# EAGLE board 3K_valdiklis_v1.2.job (EAGLE 6.4)
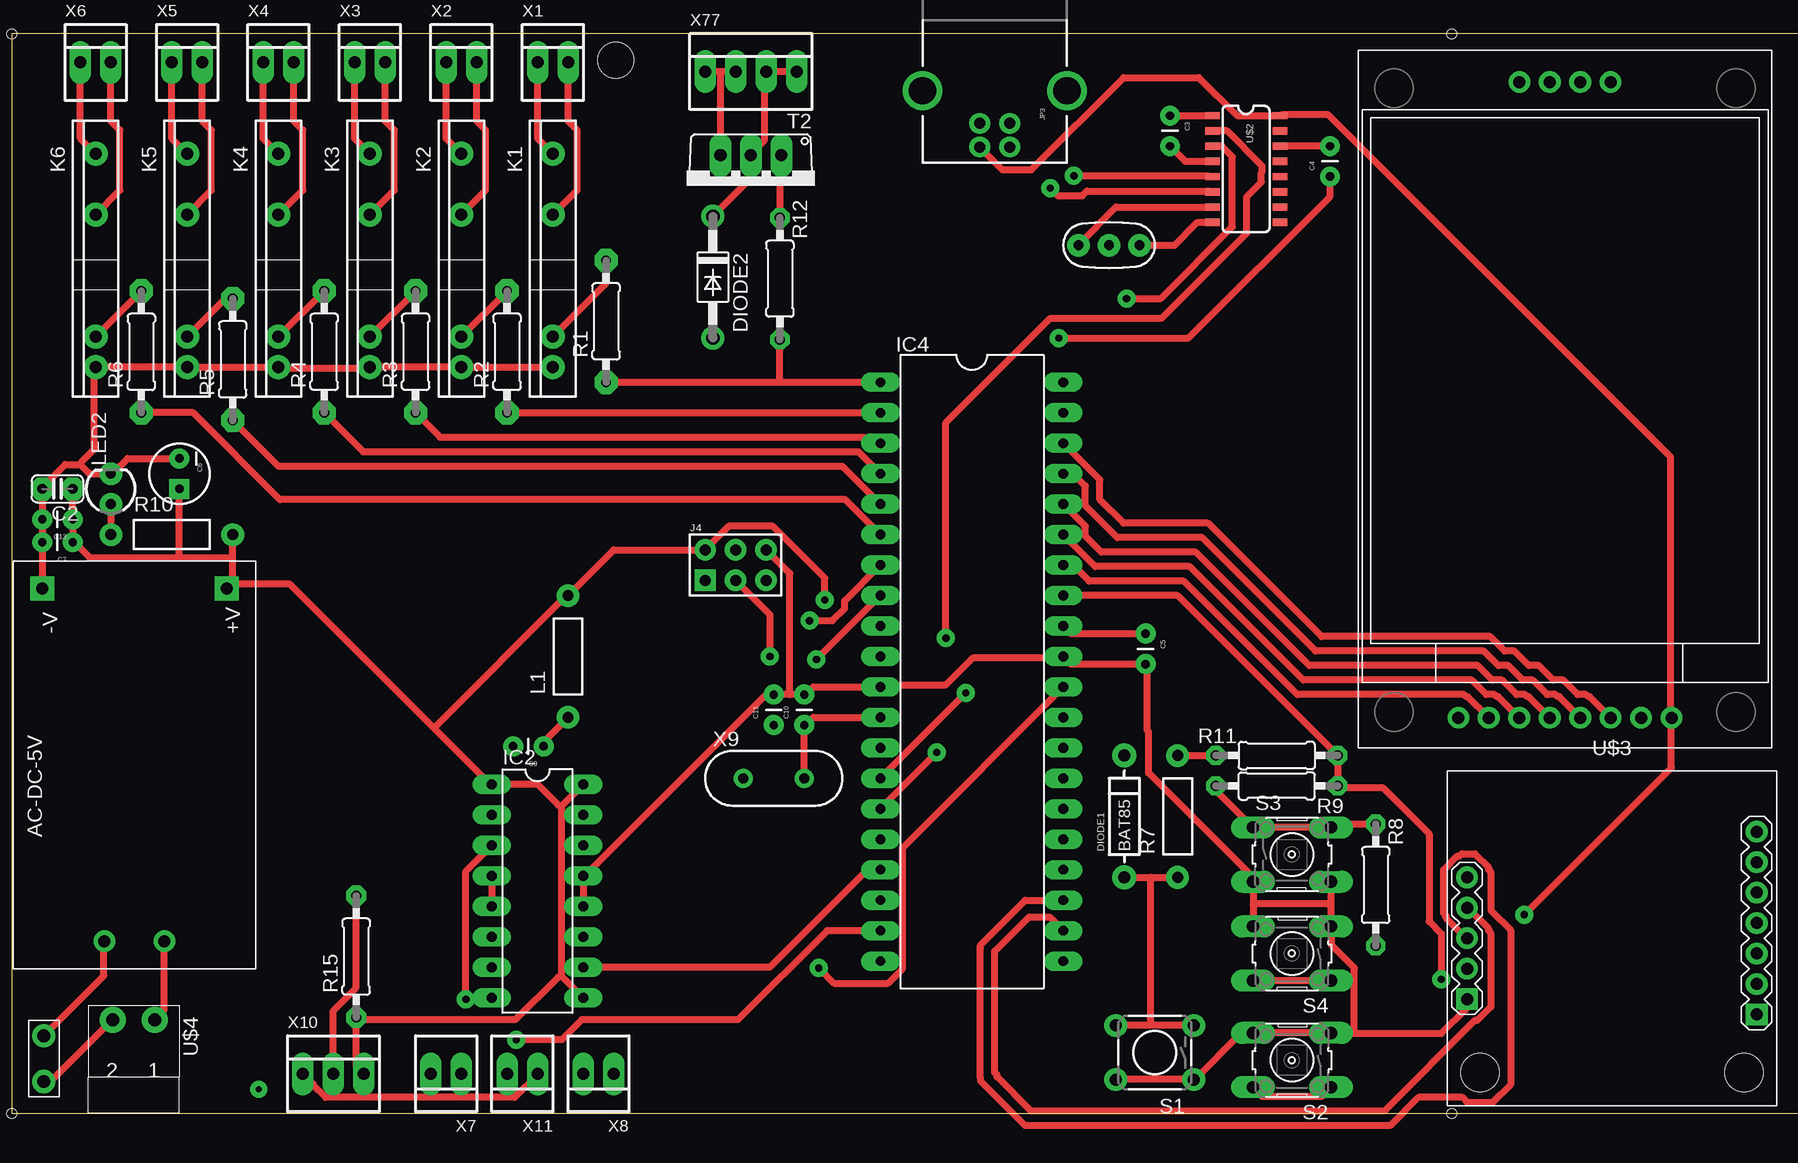
[diagram p0: board, top side]
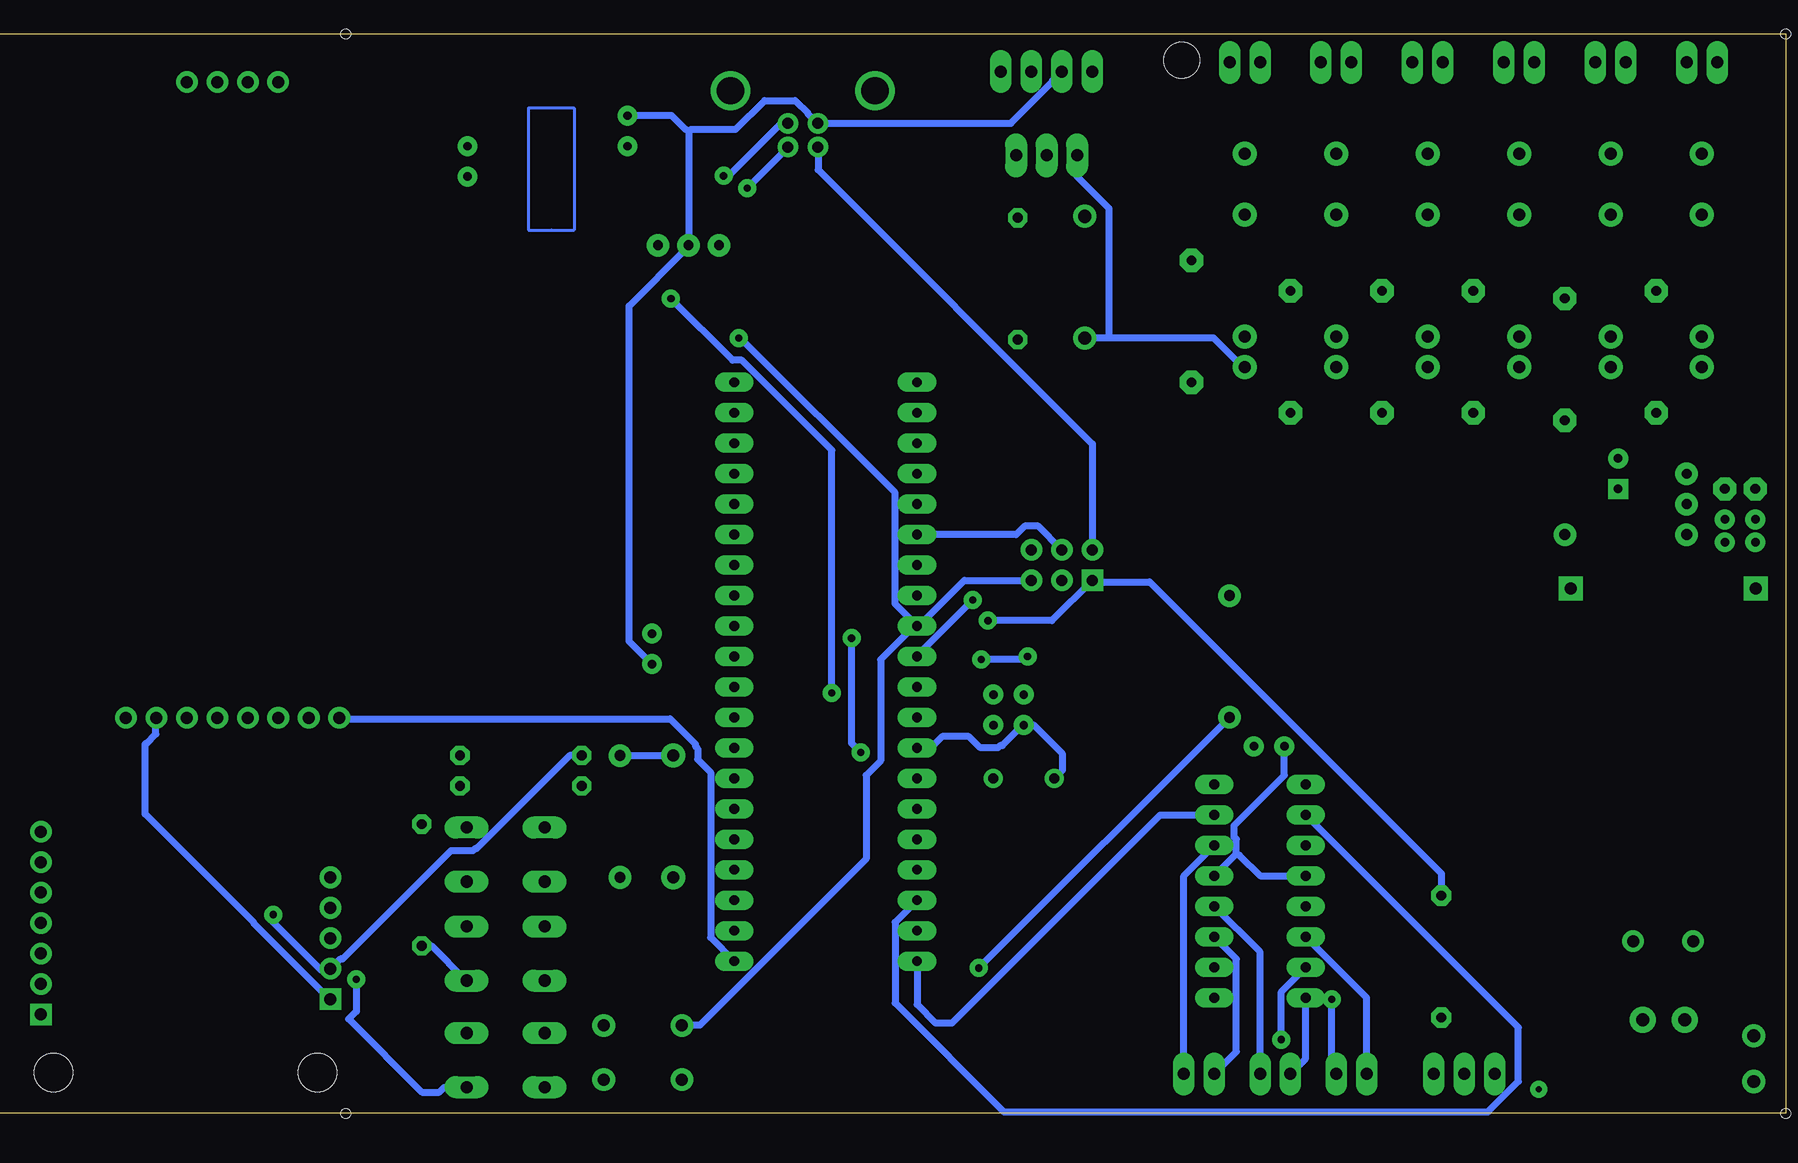
[diagram p1: board, bottom side, seen from below]

No outline drawn. Coordinates in mm, seen from the top.
Copper layers (1*16): Top 0.035mm / dielectric 1.5mm / Bottom 0.035mm
Design rules "3K_valdiklis_v1 *": minimum track width 0.6mm, minimum drill 0.6mm, track to track 0.6mm, track to pad 0.6mm, pad to pad 0.6mm, via to via 0.6mm, smd to smd 0.6mm, copper to edge 0.6mm, drill to drill 0.6mm, minimum pad ring 0.4mm, minimum via ring 0.45mm, stop-mask expansion 0.6mm, vias tented up to drill 0.6mm, thermal gap 0.6mm
Net classes: 1 vcc: width 0.5 mm; 4 gnd: width 0.5 mm; 5 220v: width 0.5 mm
Holes 3 mm at 50.34,87.81
Holes 0.8 mm at 0,0 0,90 120,90 120,0
Milling: 4 lines

## Footprints (pad centres in the part's own frame; a part is rotated, then mirrored left to right if it is on the bottom)
HLK-PM01_AC_DC = drill 1 pad 2 square: +V 31.7,2.4; -V 31.7,17.8 | drill 1: AC0 2.3,12.6; AC1 2.3,7.6
C025-024X044 = drill 0.813 pad 1.93 octagon: 1 -1.27,0; 2 1.27,0
CAP-PTH-SMALL = drill 0.7 pad 1.651: 1 0,0; 2 2.54,0
CPOL-RADIAL-10UF-25V = drill 0.7 pad 1.651 square: 1 1.27,0 | drill 0.7 pad 1.651: 2 -1.27,0
DIODE-TH-0.4 = drill 1 pad 1.981: A -5.08,0; C 5.08,0
DO41-10 = drill 1.118: A 5.08,0; C -5.08,0
DIL16 = drill 0.813 long: 1 -8.89,-3.81; 2 -6.35,-3.81; 3 -3.81,-3.81; 4 -1.27,-3.81; 5 1.27,-3.81; 6 3.81,-3.81; 7 6.35,-3.81; 8 8.89,-3.81; 9 8.89,3.81; 10 6.35,3.81; 11 3.81,3.81; 12 1.27,3.81; 13 -1.27,3.81; 14 -3.81,3.81; 15 -6.35,3.81; 16 -8.89,3.81
DIL40 = drill 0.813 long: 1 -24.13,-7.62; 2 -21.59,-7.62; 3 -19.05,-7.62; 4 -16.51,-7.62; 5 -13.97,-7.62; 6 -11.43,-7.62; 7 -8.89,-7.62; 8 -6.35,-7.62; 9 -3.81,-7.62; 10 -1.27,-7.62; 11 1.27,-7.62; 12 3.81,-7.62; 13 6.35,-7.62; 14 8.89,-7.62; 15 11.43,-7.62; 16 13.97,-7.62; 17 16.51,-7.62; 18 19.05,-7.62; 19 21.59,-7.62; 20 24.13,-7.62; 21 24.13,7.62; 22 21.59,7.62; 23 19.05,7.62; 24 16.51,7.62; 25 13.97,7.62; 26 11.43,7.62; 27 8.89,7.62; 28 6.35,7.62; 29 3.81,7.62; 30 1.27,7.62; 31 -1.27,7.62; 32 -3.81,7.62; 33 -6.35,7.62; 34 -8.89,7.62; 35 -11.43,7.62; 36 -13.97,7.62; 37 -16.51,7.62; 38 -19.05,7.62; 39 -21.59,7.62; 40 -24.13,7.62
HEAD3X2 = drill 0.914 pad 1.778 square: 1 0,0 | drill 0.914 pad 1.778: 2 0,2.54; 3 2.54,0; 4 2.54,2.54; 5 5.08,0; 6 5.08,2.54
1X02_BIG = drill 1.067 pad 1.93: P$1 0,0; P$2 3.81,0
USB-B-PTH = drill 0.914 pad 1.676: D+ 0,1.25; D- 1.981,1.25; GND 0,-1.25; VBUS 1.981,-1.25 | drill 2.286: S1 -2.718,-6.02; S2 -2.718,6.02
S202T02 = drill 1 pad 2: A 10.16,0; DS1 -5.08,0; DS2 0,0; K 12.7,0
RES-AXIAL-0.4 = drill 0.9 pad 1.88: P$1 -5.08,0; P$2 5.08,0
LED3MM = drill 0.813 pad 1.88: A -1.27,0; K 1.27,0
0207/10 = drill 0.813 pad 1.93 octagon: 1 -5.08,0; 2 5.08,0
0207/10' = drill 0.813 octagon: 1 -5.08,0; 2 5.08,0
0207/10'' = drill 0.813 pad 1.676 octagon: 1 -5.08,0; 2 5.08,0
TACTILE-PTH = drill 1.016 pad 1.88: 1 -3.251,2.261; 2 3.251,2.261; 3 -3.251,-2.261; 4 3.251,-2.261
B3F-10XX = drill 1.016 long: 1 -3.251,2.261; 2 3.251,2.261; 3 -3.251,-2.261; 4 3.251,-2.261
TO220AV = drill 1.016 long: B -2.54,-2.54; C 0,-2.54; E 2.54,-2.54
1.8"_TFT = drill 1 pad 1.778: P$3 55.5,21.05; P$4 55.5,18.52; P$5 55.5,15.98; P$6 55.5,13.44; P$9 2.5,26.14; P$10 2.5,23.6; P$11 2.5,21.06; P$12 2.5,18.52; P$13 2.5,15.98; P$14 2.5,13.44; P$15 2.5,10.9; P$16 2.5,8.36
SO016 = smd 0.6 x 1.2: 1 -4.445,-2.8; 2 -3.175,-2.8; 3 -1.905,-2.8; 4 -0.635,-2.8; 5 0.635,-2.8; 6 1.905,-2.8; 7 3.175,-2.8; 8 4.445,-2.8; 9 4.445,2.8; 10 3.175,2.8; 11 1.905,2.8; 12 0.635,2.8; 13 -0.635,2.8; 14 -1.905,2.8; 15 -3.175,2.8; 16 -4.445,2.8
RTC_EEPROM_BATTERY = drill 1 square: J1.1 -12.065,-5.08; J2.1 12.065,-6.35 | drill 1: J1.2 -12.065,-2.54; J1.3 -12.065,0; J1.4 -12.065,2.54; J1.5 -12.065,5.08; J2.2 12.065,-3.81; J2.3 12.065,-1.27; J2.4 12.065,1.27; J2.5 12.065,3.81; J2.6 12.065,6.35; J2.7 12.065,8.89 | hole 3.2: -11,-11.176; 11,-11.176
2-3.50 = drill 1.1 pad 2.184: 1 2.05,1.2; 2 5.55,1.2
22-23-2021 = drill 1 long: 1 -1.27,0; 2 1.27,0
HC49US = drill 0.813: 1 -2.54,0; 2 2.54,0
22-23-2031 = drill 1 long: 1 -2.54,0; 2 0,0; 3 2.54,0
22-23-2041 = drill 1 long: 1 -3.81,0; 2 -1.27,0; 3 1.27,0; 4 3.81,0
RESONATOR-PTH = drill 0.8 pad 1.88: 1 -2.54,0; 2 0,0; 3 2.54,0

## Placement (x,y rotation side)
AC-DC-5V  HLK-PM01_AC_DC  [HLK-PM01_AC_DC]  20.32,12.06 90 top
C2  [C025-024X044]  3.81,52.07 180 top
C3  100n  [CAP-PTH-SMALL]  96.52,83.19 270 top
C4  100n  [CAP-PTH-SMALL]  109.86,78.11 90 top
C5  100n  [CAP-PTH-SMALL]  94.49,40.01 270 top
C6  4u7  [CPOL-RADIAL-10UF-25V]  13.97,53.34 270 top
C7  100n  [CAP-PTH-SMALL]  5.08,47.62 180 top
C9  100n  [CAP-PTH-SMALL]  44.32,30.61 180 top
C10  22p  [CAP-PTH-SMALL]  66.04,32.38 90 top
C11  22p  [CAP-PTH-SMALL]  63.5,32.38 90 top
C13  100n  [CAP-PTH-SMALL]  5.08,49.53 180 top
DIODE1  BAT85  [DIODE-TH-0.4]  92.71,24.77 90 top
DIODE2  1N4004  [DO41-10]  58.42,69.72 270 top
IC2  L293D  [DIL16]  43.81,18.54 270 top
IC4  ATMEGA1284  [DIL40]  80.01,36.83 270 top
J4  HEAD3X2  [HEAD3X2]  57.78,44.45 0 top
JP2  M02PTH2  [1X02_BIG]  2.67,6.48 270 top
JP3  USB-B  [USB-B-PTH]  81.92,82.55 270 top
K1  S202T02  [S202T02]  45.09,74.93 270 top
K2  S202T02  [S202T02]  37.47,74.93 270 top
K3  S202T02  [S202T02]  29.84,74.93 270 top
K4  S202T02  [S202T02]  22.23,74.93 270 top
K5  S202T02  [S202T02]  14.61,74.93 270 top
K6  S202T02  [S202T02]  6.99,74.93 270 top
L1  10uH  [RES-AXIAL-0.4]  46.35,38.1 90 top
LED2  PWR  [LED3MM]  8.26,52.07 90 top
R1  330  [0207/10]  49.53,66.04 90 top
R2  330  [0207/10]  41.27,63.5 90 top
R3  330  [0207/10]  33.66,63.5 90 top
R4  330  [0207/10]  26.04,63.5 90 top
R5  330  [0207/10]  18.41,62.87 90 top
R6  330  [0207/10]  10.79,63.5 90 top
R7  10k  [RES-AXIAL-0.4]  97.16,24.77 90 top
R8  3k3  [0207/10']  113.67,19.05 90 top
R9  1k  [0207/10']  105.41,27.3 0 top
R10  1k  [RES-AXIAL-0.4]  13.34,48.26 0 top
R11  2k  [0207/10']  105.41,29.84 180 top
R12  2k  [0207/10']  64.01,69.6 90 top
R15  4.7K  [0207/10'']  28.7,13.08 90 top
S1  RESET  [TACTILE-PTH]  95.25,5.08 180 top
S2  [B3F-10XX]  106.68,4.45 180 top
S3  [B3F-10XX]  106.68,21.59 0 top
S4  [B3F-10XX]  106.68,13.34 180 top
T2  TIP120V  [TO220AV]  61.59,77.34 180 top
U$1  1.8"_TFT  [1.8"_TFT]  146.69,30.48 90 top
U$2  CH340G  [SO016]  102.87,78.74 270 top
U$3  RTC-EEPROM-BATTERY  [RTC_EEPROM_BATTERY]  133.35,14.61 0 top
U$4  2-3.50  [2-3.50]  13.97,9.02 180 top
X1  Boiler pump  [22-23-2021]  45.09,87.63 0 top
X2  Storage tank pump  [22-23-2021]  37.47,87.63 0 top
X3  Radiator pump  [22-23-2021]  29.84,87.63 0 top
X4  4 way valve 1  [22-23-2021]  22.23,87.63 0 top
X5  4 way valve 2  [22-23-2021]  14.61,87.63 0 top
X6  Floor heating  [22-23-2021]  6.99,87.63 0 top
X7  motorized valve 1  [22-23-2021]  36.2,3.3 180 top
X8  motorized valve 2  [22-23-2021]  48.9,3.3 180 top
X9  16MHz  [HC49US]  63.5,27.94 0 top
X10  22-23-2031  [22-23-2031]  26.8,3.3 0 top
X11  +12V  [22-23-2021]  42.55,3.3 180 top
X77  PUMP1  [22-23-2041]  61.59,86.87 0 top
Y1  12mhz  [RESONATOR-PTH]  91.44,72.39 0 top

## Library data of the parts
AC-DC-5V = HLK-PM01
C2 = rcl-1
C3-C7 C9 C13 LED2 S1 X9 = SparkFun
C10 C11 = SparkFun; OPTION: Do not fit for ceramic resonator
DIODE1 L1 R7 R10 = SteveMarple
DIODE2 = diode
IC2 = st-microelectronics; MPN: L293D; OC_FARNELL: 9589619; OC_NEWARK: 56P8249
IC4 = SteveMarple; MPN: ATMEGA644-20PU; OC_FARNELL: 1288340; OC_NEWARK: 23M5060
J4 = MyCON2
JP2 = SparkFun-Connectors-1
JP3 = SparkFun-Connectors-1; PROD_ID: CONN-08278
K1-K6 = relay-1
R1-R6 = resistor-1
R8 R9 R11 R12 = resistor
R15 = adafruit
S2-S4 = switch-omron; MPN: B3F-1000; OC_FARNELL: 176432; OC_NEWARK: 36M3542
T2 = rocketfarm
U$1 = tft_1.8_1.44_oled_0.96
U$2 = ch340
U$3 = diy-modules-1
U$4 = con-phoenix-350-1
X1-X8 X11 = con-molex; MF: MOLEX; MPN: 22-23-2021; OC_FARNELL: 1462926; OC_NEWARK: 25C3832
X10 = con-molex; MF: MOLEX; MPN: 22-23-2031; OC_FARNELL: 1462950; OC_NEWARK: 30C0862
X77 = con-molex; MF: MOLEX; MPN: 22-23-2041; OC_FARNELL: 1462920; OC_NEWARK: 38C0355
Y1 = SparkFun-FreqCtrl

## Nets
220V [220v]: AC-DC-5V.AC1 U$4.1
!RESET: C4.1 DIODE1.A IC4.9 J4.5 R7.P$1 S1.3 S1.4
+12V: DIODE2.C T2.C X77.3 X77.4
A0: IC4.40
A1: IC4.39
A2: IC4.38 U$1.P$14
A3: IC4.37 U$1.P$13
A4: IC4.36 U$1.P$12
A5: IC4.35 U$1.P$11
A6: IC4.34 U$1.P$10
A7: IC4.33 R9.2 R11.1 S2.1 S2.2
AREF: C5.1 IC4.32
AVCC [vcc]: C9.1 IC4.30 L1.P$1
D0: IC4.1 R1.1 R12.1
D1: IC4.2 R2.1
D2: IC4.3 R3.1
D3: IC4.4 R4.1
D4: IC4.5 R5.1
D5(MOSI): IC4.6 J4.4 R6.1
D6(MISO): IC4.7 J4.1 R15.2 X10.2
D7(SCK): IC4.8 J4.3
D8(RX0): IC4.14 U$2.3
D9(TX0): IC4.15 U$2.2
D10(RX1): IC4.16
D11(TX1): IC2.10 IC4.17
D12: IC2.2 IC4.18
D13: IC2.7 IC4.19
D14: IC2.15 IC4.20
D15: IC4.21 U$1.P$9
D16(SCL): IC4.22 U$3.J1.4
D17(SDA): IC4.23 U$3.J1.3
D18(TCK): IC4.24
D19(TMS): IC4.25
D20(TDO): IC4.26
D21: IC4.27
D22: IC4.28
D23: IC4.29
GND [vcc]: AC-DC-5V.-V C2.2 C3.1 C5.2 C6.2 C7.2 C9.2 C10.2 C11.2 C13.2 DIODE2.A IC2.4 IC2.5 IC2.12 IC2.13 IC4.11 IC4.31 J4.6 JP3.GND K1.K K2.K K3.K K4.K K5.K K6.K LED2.K S1.1 S1.2 S2.3 S2.4 S3.3 S3.4 S4.3 S4.4 T2.E U$1.P$15 U$2.1 U$3.J1.1 X10.1 X11.1 X77.1 X77.2 Y1.2
GND.2: U$3.J2.2
MV1.1: IC2.3 X7.1
MV1.2: IC2.6 X7.2
MV2.1: IC2.14 X8.1
MV2.2: IC2.11 X8.2
N$1: C11.1 IC4.13 X9.1
N$2: C10.1 IC4.12 X9.2
N$3 [220v]: AC-DC-5V.AC0 JP2.P$1
N$4 [220v]: JP2.P$2 U$4.2
N$6: R8.1 S4.1 S4.2
N$7: U$2.7 Y1.1
N$8: LED2.A R10.P$1
N$9: U$2.8 Y1.3
N$10: R8.2 R9.1 S3.1 S3.2
N$11: C4.2 U$2.14
N$12: JP3.D- U$2.6
N$13: R12.2 T2.B
N$14: C3.2 U$2.4
N$16: K3.A R3.2
N$17: U$3.J1.5
N$18 [220v]: K3.DS1 X3.1
N$19: IC2.8 X11.2
N$22: JP3.D+ U$2.5
N$23 [220v]: K3.DS2 X3.2
N$24: K2.A R2.2
N$25 [220v]: K2.DS1 X2.1
N$26 [220v]: K2.DS2 X2.2
N$28: K4.A R4.2
N$29 [220v]: K4.DS1 X4.1
N$30 [220v]: K4.DS2 X4.2
N$31: K1.A R1.2
N$32 [220v]: K1.DS1 X1.1
N$33 [220v]: K1.DS2 X1.2
N$34: K6.A R6.2
N$35 [220v]: K6.DS1 X6.1
N$36 [220v]: K6.DS2 X6.2
N$37: K5.A R5.2
N$38 [220v]: K5.DS1 X5.1
N$39 [220v]: K5.DS2 X5.2
VCC [vcc]: AC-DC-5V.+V C2.1 C6.1 C7.1 C13.1 DIODE1.C IC2.1 IC2.9 IC2.16 IC4.10 J4.2 JP3.VBUS L1.P$2 R7.P$2 R10.P$2 R11.2 R15.1 U$1.P$16 U$2.16 U$3.J1.2 X10.3
VCC.2: U$3.J2.3

## Tracks (layer width: path | path; a pad name or v marks a point on that pad's centre or on a via)
220V
  Top 0.6: AC-DC-5V.AC1 12.7,14.35 12.7,8.64 11.94,7.87 U$4.1
!RESET  (via drill 0.6)
  Top 0.6: DIODE1.A 94.93,19.68 | 94.93,19.68 R7.P$1 | 94.93,7.37 98.49,7.37 S1.3 | 94.93,7.37 92.01,7.37 S1.4 | 94.93,19.68 94.93,19.43 94.93,7.62 94.93,7.37 | C4.1 109.86,76.45 98.04,64.64 v87.25,64.64
  Bottom 0.6: J4.5 68.45,44.45 72.14,40.77 IC4.9 | v87.25,64.64 87.12,64.64 74.23,51.75 74.23,42.48 72.58,40.83 IC4.9 | S1.4 91.95,7.37 90.49,7.37 76.64,21.21 76.64,28.19 75.44,29.4 75.44,37.85 72.71,40.58 IC4.9
+12V
  Top 0.6: X77.4 X77.3 62.74,86.61 62.74,81.15 61.72,80.14 T2.C 61.59,77.98 DIODE2.C
A2
  Top 0.6: IC4.38 90.68,52.83 90.68,51.18 92.65,49.21 99.69,49.21 109.16,39.75 123.19,39.75 124.4,38.54 125.22,38.54 126.43,37.34 127.25,37.34 128.46,36.13 129.29,36.13 130.49,34.92 131.19,34.92 131.38,34.73 131.51,34.73 133.22,33.02 U$1.P$14
A3
  Top 0.6: IC4.37 88.46,53.34 89.47,52.32 89.47,50.67 92.14,48.01 99.19,48.01 108.65,38.54 122.68,38.54 123.89,37.34 124.71,37.34 125.92,36.13 126.75,36.13 127.95,34.92 128.65,34.92 128.84,34.73 128.97,34.73 130.68,33.02 U$1.P$13
A4
  Top 0.6: IC4.36 89.47,48.96 89.47,48.13 90.81,46.8 98.68,46.8 108.14,37.34 122.17,37.34 123.38,36.13 124.21,36.13 125.41,34.92 126.11,34.92 126.3,34.73 126.43,34.73 128.14,33.02 U$1.P$12
A5
  Top 0.6: IC4.35 90.3,45.59 98.17,45.59 107.63,36.13 121.67,36.13 122.87,34.92 123.57,34.92 123.76,34.73 123.89,34.73 125.6,33.02 U$1.P$11
A6
  Top 0.6: IC4.34 88.46,45.72 89.79,44.39 97.66,44.39 107.12,34.92 121.03,34.92 121.22,34.73 121.35,34.73 123.06,33.02 U$1.P$10
A7  (via drill 0.6)
  Top 0.6: S2.2 103.44,2.16 104.2,1.4 109.16,1.4 109.92,2.16 S2.1 | IC4.33 97.16,43.18 R11.1 110.49,29.59 R9.2 110.74,27.18 114.24,27.18 118.11,23.3 118.11,16 119.13,14.99 v119.13,11.18
  Bottom 0.6: v119.13,11.18 119.13,8.51 119.76,7.87 113.67,1.78 112.2,1.78 111.82,2.16 109.98,2.16 S2.1
AREF
  Top 0.6: C5.1 88.27,40.01 IC4.32
AVCC  (via drill 0.6)
  Top 0.6: C9.1 44.32,30.99 L1.P$1 | IC4.30 74.23,22.16 74.23,12.06 73.03,10.86 68.52,10.86 v67.25,12.13
  Bottom 0.6: L1.P$1 v67.25,12.13
D0
  Top 0.6: R1.1 64.01,60.96 | 64.01,60.96 IC4.1 | R12.1 64.01,61.21 64.01,60.96
D1
  Top 0.6: R2.1 IC4.2
D2
  Top 0.6: IC4.3 71.56,55.88 71.06,56.39 35.69,56.39 R3.1
D3
  Top 0.6: IC4.4 70.55,55.18 29.27,55.18 R4.1
D4
  Top 0.6: IC4.5 69.22,53.98 22.23,53.98 R5.1
D5(MOSI)
  Top 0.6: R6.1 15.11,58.42 22.35,51.18 69.47,51.18 IC4.6
  Bottom 0.6: IC4.6 64.14,48.26 63.44,48.96 62.29,48.96 J4.4
D6(MISO)  (via drill 0.6)
  Top 0.6: IC4.7 69.41,42.74 69.41,42.1 68.39,41.08 v66.48,41.08 | R15.2 28.7,10.48 26.8,8.57 X10.2
  Bottom 0.6: v66.48,41.08 61.15,41.08 J4.1 57.53,44.32 53.02,44.32 28.7,20 R15.2
D7(SCK)  (via drill 0.6)
  Top 0.6: v67.06,37.85 IC4.8 | v63.18,38.1 63.18,41.59 J4.3
  Bottom 0.6: v67.06,37.85 63.44,37.85 v63.18,38.1
D8(RX0)  (via drill 0.6)
  Top 0.6: v92.9,67.94 95.76,67.94 101.73,73.91 101.73,79.76 100.84,80.64 U$2.3 | IC4.14 v79.5,35.05
  Bottom 0.6: v92.9,67.94 87.76,62.8 87,62.8 79.5,55.31 v79.5,35.05
D9(TX0)  (via drill 0.6)
  Top 0.6: v77.85,39.62 77.85,57.59 86.55,66.29 95.82,66.29 102.93,73.41 102.93,76.45 104.14,77.66 104.14,78.42 104.2,78.49 104.2,78.99 101.28,81.92 U$2.2 | IC4.15 v77.09,30.1
  Bottom 0.6: v77.85,39.62 77.85,30.86 v77.09,30.1
D11(TX1)
  Top 0.6: IC2.10 63.18,12.19 71.31,20.32 IC4.17
D12
  Bottom 0.6: IC2.2 22.29,7.18 22.29,2.67 24.83,0.13 65.15,0.13 74.23,9.21 74.23,15.94 IC4.18
D13  (via drill 0.6)
  Top 0.6: v42.04,6.16 45.85,6.16 47.5,7.81 60.52,7.81 67.94,15.24 IC4.19
  Bottom 0.6: IC2.7 42.04,10.16 v42.04,6.16
D14
  Bottom 0.6: IC2.15 52.13,24.89 69.47,7.56 70.87,7.56 72.39,9.08 IC4.20
D15
  Bottom 0.6: IC4.21 89.6,14.67 89.6,28.45 90.68,29.53 90.68,30.42 90.87,30.61 90.87,30.8 92.96,32.89 120.46,32.89 120.52,32.96 U$1.P$9
D16(SCL)
  Top 0.6: IC4.22 86.49,16.38 84.77,16.38 81.92,13.53 81.92,3.43 82.11,3.24 82.11,3.05 84.96,0.19 114.36,0.19 121.92,7.75 122.11,7.75 123.25,8.89 123.25,15.05 123.06,15.24 123.06,15.43 121.35,17.14 U$3.J1.4
D17(SDA)
  Top 0.6: IC4.23 84.45,17.78 80.71,14.03 80.71,13.78 80.71,2.98 80.71,2.73 84.45,-1.02 114.87,-1.02 117.22,1.33 120.9,1.33 121.35,0.89 123.38,0.89 124.9,2.41 124.9,15.3 123.25,16.95 123.25,20.13 123.06,20.32 123.06,20.51 121.92,21.65 120.84,21.65 120.65,21.46 120.46,21.46 119.32,20.32 119.32,16.7 119.51,16.51 119.51,16.32 121.22,14.61 U$3.J1.3
GND
  Top 0.6: IC2.12 IC2.13 47.88,19.94 62.74,34.8 63.25,34.8 C11.2 64.83,34.92 | 64.83,34.92 C10.2 66.29,35.05 66.8,35.56 IC4.11 72.64,35.69 77.79,35.69 80.07,37.97 87.38,37.97 IC4.31 88.27,37.47 C5.2 94.61,37.21 94.61,31.94 94.74,31.81 94.74,28.38 103.38,19.75 103.38,19.62 S3.3 103.44,19.3 103.44,17.46 | 103.44,17.46 103.44,15.62 S4.4 | 109.92,17.46 109.92,19.3 S3.4 | 109.92,17.46 109.92,15.62 S4.3 109.98,15.3 109.98,14.03 111.89,12.13 111.89,6.92 111.89,6.67 | 103.44,17.46 103.69,17.46 109.67,17.46 109.92,17.46 | U$3.J1.1 121.28,8.83 119.13,6.67 111.89,6.67 | 111.89,6.67 109.98,6.67 S2.3 109.67,6.73 103.69,6.73 S2.4 103.19,6.54 102.3,6.54 98.74,2.98 S1.1 98.49,2.86 92.01,2.86 S1.2 | J4.6 64.83,45.02 64.83,35.18 64.83,34.92 | C3.1 100.01,83.19 U$2.1 | 5.71,54.1 6.48,53.34 LED2.K 8.51,53.47 9.65,54.61 C6.2 | 5.71,54.1 4.45,54.1 2.54,52.2 C2.2 2.54,51.82 2.54,49.78 C13.2 C7.2 2.54,47.37 2.54,43.81 AC-DC-5V.-V | 5.71,54.1 5.84,54.36 6.86,55.37 6.86,61.98 K6.K 14.35,62.23 K5.K 14.86,62.23 K4.K 22.61,62.1 29.59,62.1 K3.K K2.K 37.72,62.23 K1.K | X77.2 59.05,86.87 | 59.05,86.87 X77.1 | T2.E 59.05,86.61 59.05,86.87 | IC2.4 IC2.5 | X10.1 25.08,2.48 25.08,2.41 26.16,1.33 41.91,1.33 43.81,3.24 X11.1
  Bottom 0.6: U$3.J1.1 121.35,9.53 127.64,15.81 127.64,15.88 136.72,24.96 136.72,30.8 136.65,30.86 136.59,30.86 135.83,31.62 135.83,32.96 U$1.P$15 | 91.44,81.92 Y1.2 91.57,72.14 96.39,67.31 96.39,39.37 C5.2 | 91.44,81.92 91.19,82.04 87.5,82.04 85.09,84.45 82.55,84.45 81.47,83.38 81.47,83.31 80.71,82.55 JP3.GND 80.39,82.55 64.58,82.55 61.15,85.98 61.15,86.04 X77.2 | C3.1 92.84,83.19 91.69,82.04 91.44,81.92 | 56.39,64.64 47.69,64.64 45.34,62.29 K1.K | 56.39,64.64 DIODE2.A | T2.E 59.05,78.11 56.39,75.44 56.39,64.9 56.39,64.64 | C9.2 41.78,28.19 45.97,24 45.97,23.05 45.78,22.86 45.78,21.65 | IC2.13 45.78,21.65 | IC2.4 43.81,19.81 45.53,21.53 45.78,21.65 | IC2.12 43.81,13.46 X11.1
MV1.1  (via drill 0.6)
  Top 0.6: IC2.3 37.85,20.19 v37.85,9.53
  Bottom 0.6: v37.85,9.53 37.85,3.68 X7.1
MV1.2
  Bottom 0.6: IC2.6 34.92,9.65 X7.2
MV2.1
  Bottom 0.6: IC2.14 50.16,19.81 X8.1
MV2.2
  Bottom 0.6: IC2.11 45.78,12.89 45.78,5.14 X8.2
N$1
  Bottom 0.6: X9.1 60.26,28.64 60.26,29.97 62.67,32.38 C11.1 63.69,32.26 65.28,30.67 65.47,30.67 65.66,30.48 67.12,30.48 68.07,31.43 70.29,31.43 71.25,30.48 IC4.13
N$2
  Top 0.6: X9.2 C10.1 66.29,32.51 66.8,33.02 IC4.12
N$3
  Top 0.6: JP2.P$1 7.68,11.49 7.68,14.35 AC-DC-5V.AC0
N$4
  Top 0.6: JP2.P$2 3.24,2.67 8.38,7.81 U$4.2
N$5  (via drill 0.51)
  other vias: 20.57,2.03
N$6
  Top 0.6: S4.2 103.44,11.05 109.92,11.05 S4.1
  Bottom 0.6: R8.1 112.84,13.97 109.98,11.11 S4.1
N$7
  Top 0.6: Y1.1 88.9,72.45 92.01,75.56 100.01,75.56 U$2.7
N$8
  Top 0.6: LED2.A R10.P$1
N$9
  Top 0.6: Y1.3 96.9,72.39 98.81,74.3 100.01,74.3 U$2.8
N$10
  Top 0.6: R8.2 110.24,24.13 109.98,23.88 S3.2 109.67,23.88 103.69,23.88 S3.1 103.38,23.88 100.33,26.92 R9.1
N$11
  Top 0.6: C4.2 105.73,80.64 U$2.14
N$12  (via drill 0.6)
  Top 0.6: v86.55,77.15 87.19,76.52 89.22,76.52 89.6,76.9 99.69,76.9 99.76,76.83 100.01,76.83 U$2.6
  Bottom 0.6: v86.55,77.15 83.19,80.52 JP3.D-
N$13
  Top 0.6: R12.2 64.01,79.76 T2.B
N$14
  Top 0.6: C3.2 97.79,79.38 100.01,79.38 U$2.4
N$16
  Top 0.6: K3.A R3.2
N$18
  Top 0.6: X3.1 28.57,81.28 K3.DS1
N$19
  Bottom 0.6: IC2.8 40.01,4.57 X11.2
N$20
  Bottom 0.254: 100.97,83.82 100.97,73.66 102.87,73.66 104.78,73.66 104.78,83.82 100.97,83.82
N$22  (via drill 0.6)
  Top 0.6: v88.52,78.17 99.69,78.17 99.76,78.11 100.01,78.11 U$2.5
  Bottom 0.6: v88.52,78.17 88.08,78.17 83.69,82.55 83.19,82.55 JP3.D+
N$23
  Top 0.6: X3.2 31.11,82.74 31.88,81.98 31.88,76.96 K3.DS2
N$24
  Top 0.6: K2.A R2.2
N$25
  Top 0.6: X2.1 36.2,81.28 K2.DS1
N$26
  Top 0.6: X2.2 38.73,82.74 39.5,81.98 39.5,76.96 K2.DS2
N$28
  Top 0.6: K4.A R4.2
N$29
  Top 0.6: X4.1 20.95,81.28 K4.DS1
N$30
  Top 0.6: X4.2 23.5,82.74 24.26,81.98 24.26,76.96 K4.DS2
N$31
  Top 0.6: R1.2 49.53,69.22 K1.A
N$32
  Top 0.6: X1.1 43.81,81.28 K1.DS1
N$33
  Top 0.6: X1.2 46.35,82.74 47.12,81.98 47.12,76.96 K1.DS2
N$34
  Top 0.6: K6.A R6.2
N$35
  Top 0.6: X6.1 5.71,81.28 K6.DS1
N$36
  Top 0.6: X6.2 8.26,82.74 9.02,81.98 9.02,76.96 K6.DS2
N$37
  Top 0.6: R5.2 17.78,67.94 K5.A
N$38
  Top 0.6: X5.1 13.34,81.28 K5.DS1
N$39
  Top 0.6: X5.2 15.88,82.74 16.64,81.98 16.64,76.96 K5.DS2
VCC  (via drill 0.6)
  Top 0.6: R7.P$2 R11.2 | v126.05,16.57 138.3,28.83 138.3,32.96 U$1.P$16 138.24,33.27 138.24,54.74 109.73,83.25 105.92,83.25 U$2.16 102.11,83.19 98.93,86.36 92.65,86.36 84.96,78.68 82.55,78.68 80.71,80.52 JP3.VBUS | C2.1 5.08,49.78 C13.1 C7.1 5.33,47.5 6.54,46.29 13.97,46.29 | 18.41,46.29 18.41,44.26 17.97,43.81 AC-DC-5V.+V 18.67,44.13 23.18,44.13 35.18,32.13 | 18.41,46.29 R10.P$2 | 13.97,46.29 18.16,46.29 18.41,46.29 | v67.75,42.8 67.75,44.64 63.44,48.96 59.75,48.96 57.98,47.18 J4.2 50.16,46.99 L1.P$2 46.1,43.05 35.37,32.32 35.18,32.13 | C6.1 13.97,46.55 13.97,46.29 | X10.3 28.7,3.94 R15.1 28.96,7.81 41.97,7.81 45.53,11.37 45.78,11.49 | 45.78,11.49 IC2.9 | 45.78,25.59 45.78,11.49 | IC2.16 45.78,25.59 | 45.78,25.59 45.53,25.72 43.81,27.43 IC2.1 39.75,27.56 35.18,32.13
  Bottom 0.6: R11.2 101.35,29.84 109.09,22.1 109.22,22.1 109.41,21.91 111.25,21.91 120.27,12.89 120.46,12.89 U$3.J1.2 121.54,11.94 122.05,11.94 126.05,15.94 v126.05,16.57 | R7.P$2 DIODE1.C | v67.75,42.8 72.26,38.29 IC4.10 | J4.2 57.78,55.82 80.64,78.68 80.64,80.52 JP3.VBUS